# Altium PCB opa4377运放PCB.PcbDoc
Units mil, origin at the board's own origin, x right, y up, seen from the top; angles counter-clockwise.
Board outline 1195 x 787.4 mil, 2 copper layers (Top Layer, Bottom Layer); 40 components, 30 nets, 104 pads, 22 vias.
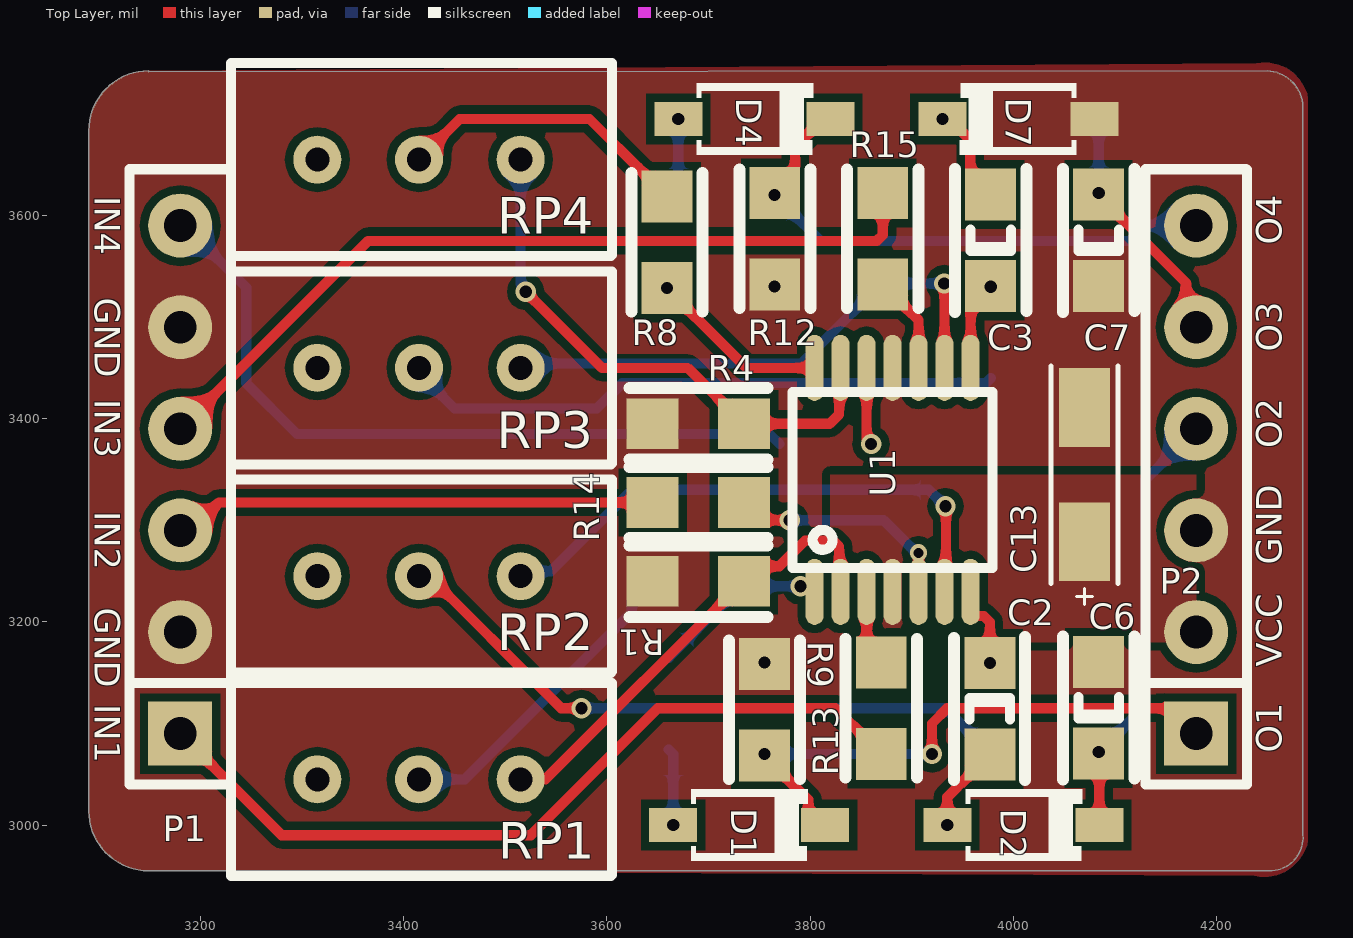
[diagram p0: Top Layer view]
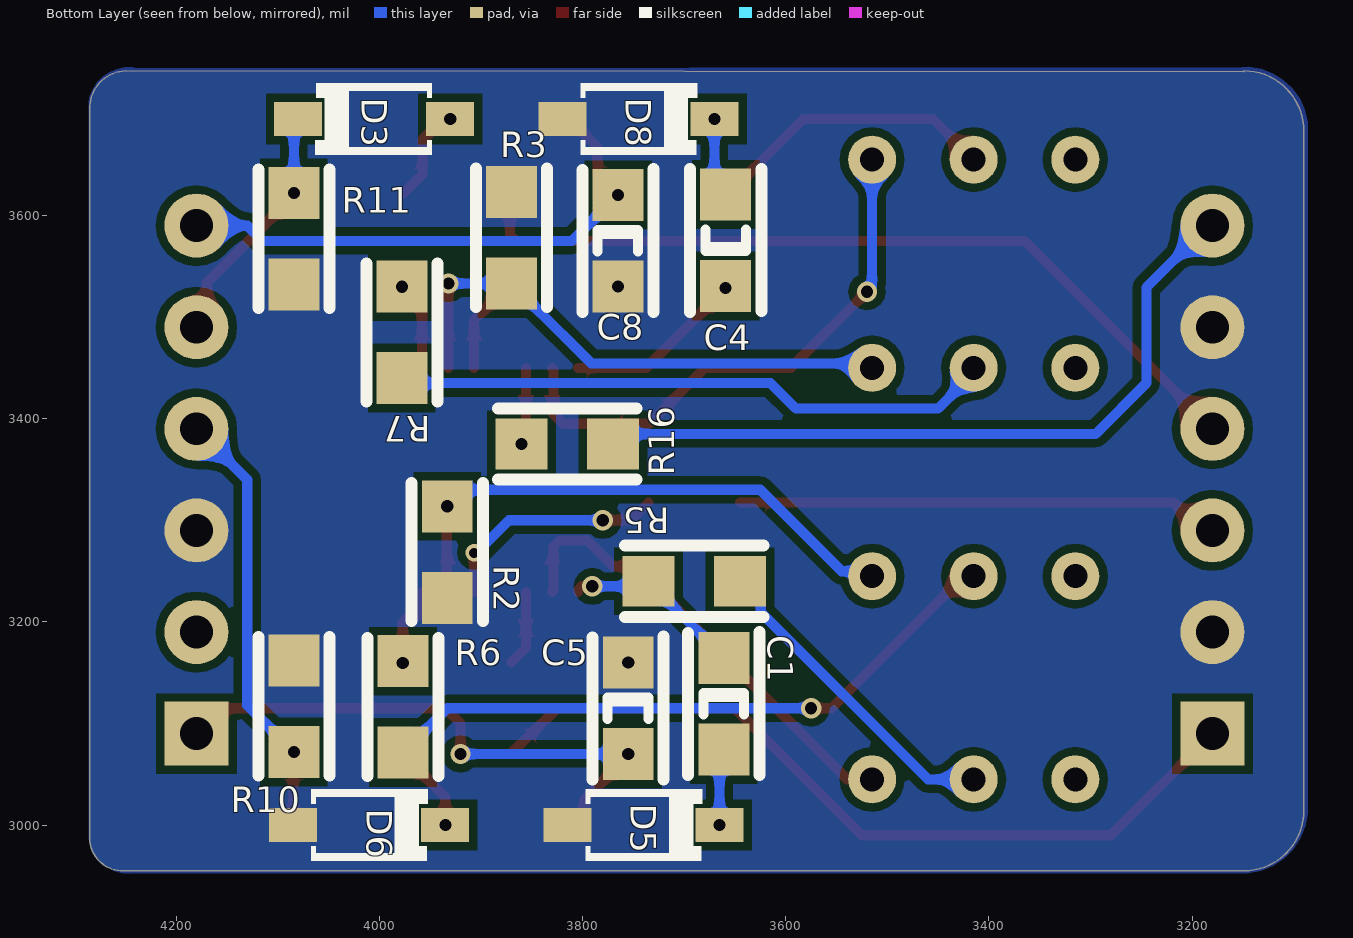
[diagram p1: Bottom Layer view, seen from below]

## Layer stack, top to bottom
Top Solder: solder mask 0.4, Solder Resist, Dk 3.5
Top Layer: signal copper 1.4
Dielectric 1: dielectric 12.6, FR-4, Dk 4.8
Bottom Layer: signal copper 1.4
Bottom Solder: solder mask 0.4, Solder Resist, Dk 3.5

## Board outline
3090,3014.06 3090,3683.35 cw(c3149.06,3683.35) 3149.06,3742.4 3149.01,3741.69 4250,3742.4 cw(c4248.42,3705.82) 4285,3704.25 4285,2990 cw(c4252.5,2987.5) 4255,2955 3149.06,2955 cw(c3149.06,3014.06)

## Design rules (kind name [scope] priority, off if disabled: settings)
Clearance [All] p1: gap=8 ignorepadtopadclearanceinfootprint=TRUE
PolygonConnect [All] p1: connectstyle=Direct reliefconductorwidth=10 reliefentries=4 polygonreliefangle="90 Angle" airgapwidth=10
RoutingVias [All] p1: holewidth=28 width=50 viastyle="Through Hole" minholewidth=28 minwidth=50 maxholewidth=28 maxwidth=50
SolderMaskExpansion [All] p1: expansion=4 istentingtop=FALSE
Width Width_1 [InNetClass('Power')] p1: maxlimit=50 minlimit=10 preferedwidth=30
Width [All] p2: maxlimit=50 minlimit=6 preferedwidth=10
30 further rules are at their usual default settings.

## Components (designator, comment, footprint, x,y, rotation, side; value= is the part's Value field where it differs from the comment)
C1 "0.1uF" C0805 3662,3120 r270 bottom
C2 "0.1uF" C0805 3975.7,3115 r270 top
C3 "0.1uF" C0805 3978.75,3575 r90 top
C4 "0.1uF" C0805 3658,3575 r90 bottom
C5 "0.1uF" C0805 3756.21,3115.59 r270 bottom
C6 "0.1uF" C0805 4085,3114.83 r90 top
C7 "0.1uF" C0805 4085,3575 r90 top
C8 "0.1uF" C0805 3766.25,3575.76 r270 bottom
C13 "106 16V" Tan-A3216 4070,3345 r90 top
D1 "1N5819" SOD-123 3740,3000 r0 top
D2 "1N5819" SOD-123 4009.8,3000 r0 top
D3 "1N5819" SOD-123 4005,3695 r0 bottom
D4 "1N5819" SOD-123 3745,3695 r0 top
D5 "1N5819" SOD-123 3740,3000 r180 bottom
D6 "1N5819" SOD-123 4010,3000 r180 bottom
D7 "1N5819" SOD-123 4005,3695 r180 top
D8 "1N5819" SOD-123 3745,3695 r180 bottom
P1 "排针1*6" LQ_SIP6 3180,3090 r90 top
P2 "排针1*6" LQ_SIP6 4180,3090 r90 top
R1 "1k" R0805 3646.97,3240 r0 top value=1K
R2 "1k" R0805 3933.16,3225.69 r90 bottom value=1K
R3 "1k" R0805 3870,3535 r90 bottom value=1K
R4 "1k" R0805 3733.03,3395 r180 top value=1K
R5 "47k" R0805 3646.97,3240 r0 bottom value=47K
R6 "47k" R0805 3976.7,3073.28 r90 bottom value=47K
R7 "47k" R0805 3977.75,3527.96 r270 bottom value=47K
R8 "47k" R0805 3659.21,3530.59 r90 top value=47K
R9 "47k" R0805 3755.21,3156.54 r270 top value=47K
R10 "47k" R0805 4084,3159.94 r270 bottom value=47K
R11 "47k" R0805 4084,3620.11 r270 bottom value=47K
R12 "47k" R0805 3765.25,3620.11 r270 top value=47K
R13 "5.1k" R0805 3870,3071.97 r90 top value=5.1K
R14 "5.1k" R0805 3646.97,3317.5 r0 top value=5.1K
R15 "5.1k" R0805 3871.5,3534.05 r90 top value=5.1K
R16 "5.1k" R0805 3858.03,3375 r180 bottom value=5.1K
RP1 "100K" 电位器 3315,3045 r0 top
RP2 "100K" 电位器 3315,3245 r0 top
RP3 "100K" 电位器 3315,3450 r0 top
RP4 "100K" 电位器 3315,3655 r0 top
U1 "OPA4377" TSSOP14 3881.18,3339.76 r90 top

## Footprints (in the part's own frame and the unit in brackets; to place one, negate y for a bottom-side part, rotate by r counter-clockwise, add the part's x,y. Pads: shape width x height; smd on the part's side, far side on the other; paste and mask are expansions set on the pad)
C0805 [mm]
  rect 1.3x1.27 smd: 1(-1.128,0.031) 2(1.158,0.031)
  silkscreen extent -1.78,-0.86 1.8,0.91, body extent -0.97,-0.6 1.03,0.66, height 0.77
LQ_SIP6 [mm]
  rect 1.6x1.6 hole 0.82: 1(0,0)
  round 1.6 hole 0.82: 2(2.54,0) 3(5.08,0) 4(7.62,0) 5(10.16,0) 6(12.7,0)
  silkscreen extent -1.27,-1.27 14.11,1.27, body extent -1.27,-1.27 13.97,1.27, height 8.5
R0805 [mm]
  rect 1.3x1.27 smd: 1(-0.05,0) 2(2.236,0)
  silkscreen extent -0.64,-0.89 2.82,0.89, body extent 0.11,-0.63 2.11,0.62, height 0.78
SOD-123 [mm] "SOD Diode;2.70mm W X 1.60mm L X 1.35mm H body"
  rect 1.2x0.85 smd: A(-1.9,0) K(1.9,0)
  silkscreen extent -1.45,-0.9 1.47,0.9, body extent -1.85,-0.8 1.85,0.8, height 1.2
Tan-A3216 [mil]
  rect 77.36x50 smd: 1(-66,0) 2(66,0)
  silkscreen extent -128,-33 107,33, body extent -63,-31 63,32, height 63
TSSOP14 [mm]
  oval 1.65x0.45 smd: 1(-2.8,1.95) 2(-2.8,1.3) 3(-2.8,0.65) 4(-2.8,0) 5(-2.8,-0.65) 6(-2.8,-1.3) 7(-2.8,-1.95) 8(2.8,-1.95) 9(2.8,-1.3) 10(2.8,-0.65) 11(2.8,0) 12(2.8,0.65) 13(2.8,1.3) 14(2.8,1.95)
  silkscreen extent -2.2,-2.5 2.2,2.5, body extent -3.23,-2.6 3.23,2.6, height 1.55
电位器 [mm]
  round 1.2 hole 0.6: 1(0,0) 2(2.54,0) 3(5.08,0)
  silkscreen extent -2.16,-2.41 7.37,2.41, body extent -2.21,-2.4 7.29,2.4, height 11.52

## Part data
C1 C2 C3 C4 C5 C6 C7 C8: library part 普通电容, "Capacitor"
C13: library part 钽电容
D1 D2 D3 D4 D5 D6 D7 D8: "1N5819 二极管 Diode", Imax=500mA, Price(RMB)=0.000, Published=8-Jun-2000, Publisher="Altium Limited", Revision="July-2002: Re-released for DXP Platform."
P1 P2: library part CON6, "Connector"
R1 R2 R3 R4 R5 R6 R7 R8 R9 R10 R11 R12 R13 R14 R15 R16: library part Res2, "Resistor", LatestRevisionDate=17-Jul-2002, LatestRevisionNote="Re-released for DXP Platform.", PackageDescription="Axial Device, Thru-Hole; 2 Leads; 0.4 in Pin Spacing", PackageReference=AXIAL-0.4, Published=8-Jun-2000, Publisher="Altium Limited"
RP1 RP2 RP3 RP4: library part VR, "3端可调电阻"
U1: "OPA4377 四路轨对轨运放"

## Via types
v1: diameter 20, hole 12, Top Layer to Bottom Layer, tented both sides, 21 vias
v2: diameter 17, hole 10, Top Layer to Bottom Layer, tented both sides, 1 vias

## Nets (pads, with @x,y where several pads share a name; then routed paths per layer and width w, separated by ;. In a path a pad name is that pad's centre, name@x,y a point inside that pad or via, vN(x,y) a via of type N, cw(c..) or ccw(c..) an arc to the next point about the centre after c; other vN are vias at no path point)
GND: C5.1 C6.2 C7.1 C8.2 C13.2 D5.A D6.A D7.A D8.A P1.2 P1.5 P2.3 R1.1 R2.1 R3.2 R4.2 R9.1 R10.1 R11.2 R12.2 U1.11
  other v1: 3755,3160 3765.04,3530.17
IN1: P1.1 R13.1 | length 802.2
  Top Layer w10: P1.1 3280,2990 3525,2990 3650,3115 3825,3115 3849.41,3090.59 3850,3090.59 3870,3070.59 R13.1
IN2: P1.3 R14.1 | length 476.4
  Top Layer w10: P1.3 3190.76,3290 3218.26,3317.5 R14.1
IN3: P1.4 R15.2 | length 811.8
  Top Layer w10: P1.4 3365,3575 3865.64,3575 3871.5,3580.86 R15.2
IN4: P1.6 R16.2 | length 734.2
  Bottom Layer w10: P1.6 3184.14,3590 3245,3529.14 3245,3435 3295,3385 3760,3385 R16.2
NetC1_1: C1.1 R5.2 U1.1 | length 181.5
  Top Layer w10: v1(3790.42,3235) 3800.85,3235 3804.41,3231.44 U1.1
  Bottom Layer w10: C1.1 3660.79,3165 3714.41,3218.62 3714.41,3220 3734.41,3240 R5.2 3740,3235 v1(3790.42,3235)
NetC1_2: C1.2 D1.A D5.K | length 76.2
  Bottom Layer w10: C1.2 3665.2,3070 v1(3665.2,3000)
NetC2_1: C2.1 R6.2 U1.7 | length 83.6
  Top Layer w10: U1.7 3957.95,3209.25 3961.52,3205.68 3971.05,3205.68 3976.91,3199.82 v1(3976.91,3159.41)
NetC2_2: C2.2 D2.A D6.K | length 87.1
  Top Layer w10: v1(3935,3000) 3935,3027.5 3956.32,3048.82 3956.91,3048.82 3976.91,3068.82 C2.2
NetC3_1: C3.1 R7.1 U1.8 | length 88.7
  Top Layer w10: U1.8 3957.95,3511 C3.1
  other v1: 3977.75,3529.93
NetC3_2: C3.2 D3.A D7.K | length 98.1
  Top Layer w10: v1(3930.2,3695) 3937.09,3695 3957.54,3674.55 3957.54,3640.59 C3.2
NetC4_1: C4.1 R8.1 U1.14 | length 178.1
  Top Layer w10: v1(3659.21,3528.62) 3659.21,3528.03 3737.24,3450 U1.14
NetC4_2: C4.2 D4.A D8.K | length 79
  Bottom Layer w10: C4.2 3670.2,3631.57 v1(3670.2,3695)
NetR1_2: R1.2 RP1.3 U1.2 | length 459.1
  Top Layer w10: RP1.3 3539.41,3045 3734.41,3240 R1.2@3735.59,3240 ; R1.2 3749.73,3254.73 3769.73,3254.73 3795,3280 3822.67,3280 3828.52,3274.14 3828.52,3231 U1.2
NetR2_2: R2.2 RP2.3 U1.6 | length 544.7
  Top Layer w10: U1.6 3933.68,3230.85 3933.68,3311.71 v1@3935,3313.03
  Bottom Layer w10: RP2.3 3519.81,3249.81 3544.81,3249.81 3625,3330 3916.88,3330 v1(3933.16,3313.73)
NetR3_1: R3.1 RP3.3 U1.9 | length 535.8
  Top Layer w10: v1(3931.97,3533.03) 3932.17,3532.83 3932.17,3450.2 U1.9
  Bottom Layer w10: RP3.3@3515.6,3446.35 3523.7,3454.45 3791.42,3454.45 3849.41,3512.44 3850,3512.44 3870,3532.44 R3.1 v1(3931.97,3533.03)
NetR4_1: R4.1 RP4.3 U1.13 | length 544.6
  Top Layer w10: v1(3520,3525) 3595,3450 3679.41,3450 3734.41,3395 R4.1 3819.14,3395 3828.52,3404.38 3828.52,3448.52 U1.13
  Bottom Layer w10: RP4.3 3515,3532.71 3520,3527.71 v1(3520,3525)
NetR5_1: R5.1 RP1.2 | length 317
  Bottom Layer w10: RP1.2 3460,3045 3624.41,3209.41 3624.41,3220 3644.41,3240 R5.1
NetR6_1: R6.1 RP2.2 | length 638.1
  Top Layer w10: RP2.2@3415,3255 3555,3115 v1(3575,3115)
  Bottom Layer w10: v1(3575,3115) 3933.01,3115 3956.11,3091.91 3956.7,3091.91 3976.7,3071.91 R6.1
NetR7_2: R7.2 RP3.2 | length 590.7
  Bottom Layer w10: RP3.2@3415.6,3446.35 3415.6,3444.4 3450,3410 3590,3410 3615,3435 3972.82,3435 R7.2
NetR8_2: R8.2 RP4.2 | length 292.8
  Top Layer w10: RP4.2 3455,3695 3582.83,3695 3638.62,3639.21 3639.21,3639.21 3659.21,3619.21 R8.2
NetR13_2: R13.2 U1.3 | length 75.5
  Top Layer w10: U1.3 3855.59,3174.41 R13.2
NetR14_2: R14.2 U1.5 | length 230.7
  Top Layer w10: R14.2 3752.5,3300 v1(3780,3300) ; v2(3906.66,3267.96) 3906.72,3267.9 3906.72,3229.58 U1.5
  Bottom Layer w10: v1(3780,3300) 3872.29,3300 3904.34,3267.96 v2(3906.66,3267.96)
NetR15_1: R15.1 U1.10 | length 97
  Top Layer w10: R15.1 3871.5,3531.49 3891.5,3511.49 3892.09,3511.49 3906.77,3496.81 U1.10
NetR16_1: R16.1 U1.12 | length 76.8
  Top Layer w10: U1.12 3855.59,3382.12 3860,3377.71 v1(3860,3375)
OUT1: C5.2 D1.K P2.1 R9.2 | length 567.6
  Top Layer w10: R9.2 3755.21,3067.92 3798.19,3024.95 3798.19,3011.73 3809.92,3000 D1.K ; v1(3920,3070) 3920,3100 3935,3115 4155,3115 P2.1
  Bottom Layer w10: v1(3755,3070) v1(3920,3070)
OUT2: C6.1 D2.K P2.4 R10.2 | length 428.6
  Top Layer w10: C6.1 4084.61,3069.6 D2.K
  Bottom Layer w10: v1(4084,3071.91) 4130,3117.91 4130,3340 P2.4
OUT3: C7.2 D3.K P2.5 R11.1 | length 245.1
  Top Layer w10: C7.2 4083.79,3620 4169.86,3533.93 4169.86,3500.14 P2.5
  Bottom Layer w10: D3.K 4084,3690.8 v1(4084,3622.08)
OUT4: C8.1 D4.K P2.6 R12.1 | length 539.4
  Top Layer w10: R12.1 3785.25,3642.08 3785.25,3667.34 3812.91,3695 D4.K
  Bottom Layer w10: v1(3765.04,3620.17) 3810.21,3575 4115,3575 4130,3590 P2.6
VCC: C13.1 P2.2 U1.4
pads on no net: RP1.1 RP2.1 RP3.1 RP4.1

## Polygon pours and split planes (outlines as drawn)
GND on Top Layer "Top Layer-No Net" (solid, remove dead copper, pour order 6): 3090,3014.05 3090,3683.35 cw(c3149.05,3683.35) 3149.06,3742.4 4239.62,3749.62 cw(c4247.5,3707.13) 4290,3715 4290,2985 cw(c4246.37,2993.61) 4237.67,2950 3149.06,2955 cw(c3149.05,3014.05)
VCC on Top Layer "VCC_L01_P003" (solid, remove dead copper, pour order 3): 4180,3180 3820,3180 3820,3345 4065,3345 4075,3345 4105,3345 4180,3345
GND on Bottom Layer "Top Layer-No Net" (solid, pour order 0): 3085.95,3017.6 3085.95,3685.95 cw(c3148.45,3683.45) 3150.95,3745.95 4238.61,3745 cw(c4246.08,3705.14) 4285.95,3712.6 4285.95,2987.6 cw(c4245.95,2992.59) 4240.95,2952.6 3150.95,2952.6 cw(c3150.94,3017.6)

## Silkscreen, mask and mechanical layers (free items; w line width, h text height)
Top Overlay:
  text "IN4" at 3096,3619 h25 r270
  text "O4" at 4264,3571 h25 r90
  text "GND" at 3096,3519 h25 r270
  text "O3" at 4264,3466 h25 r90
  text "IN3" at 3096,3419 h25 r270
  text "O2" at 4264,3371 h25 r90
  text "IN2" at 3096,3309 h25 r270
  text "GND" at 4264,3256 h25 r90
  text "GND" at 3096,3214 h25 r270
  text "VCC" at 4264,3156 h25 r90
  text "IN1" at 3096,3119 h25 r270
  text "O1" at 4264,3071 h25 r90
Bottom Solder:
  drawing of 76 lines, arcs and shapes, not listed
Mechanical 1:
  lines w10: 3149.01,3741.69 4250,3742.4 cw(c4248.42,3705.82) 4285,3704.25 4285,2990 cw(c4252.5,2987.5) 4255,2955 3149.06,2955 cw(c3149.06,3014.06) 3090,3014.06 3090,3683.35 cw(c3149.06,3683.35) 3149.06,3742.4